# Altium PCB v1.PcbDoc (part 1 of 2)
Units mil, origin at the board's own origin, x right, y up, seen from the top; angles counter-clockwise.
Board outline 4577.38 x 7303.15 mil, 2 copper layers (Top Layer, Bottom Layer); 301 components, 195 nets, 1014 pads, 0 vias.
Unrouted connection lines stored in the file: 517.
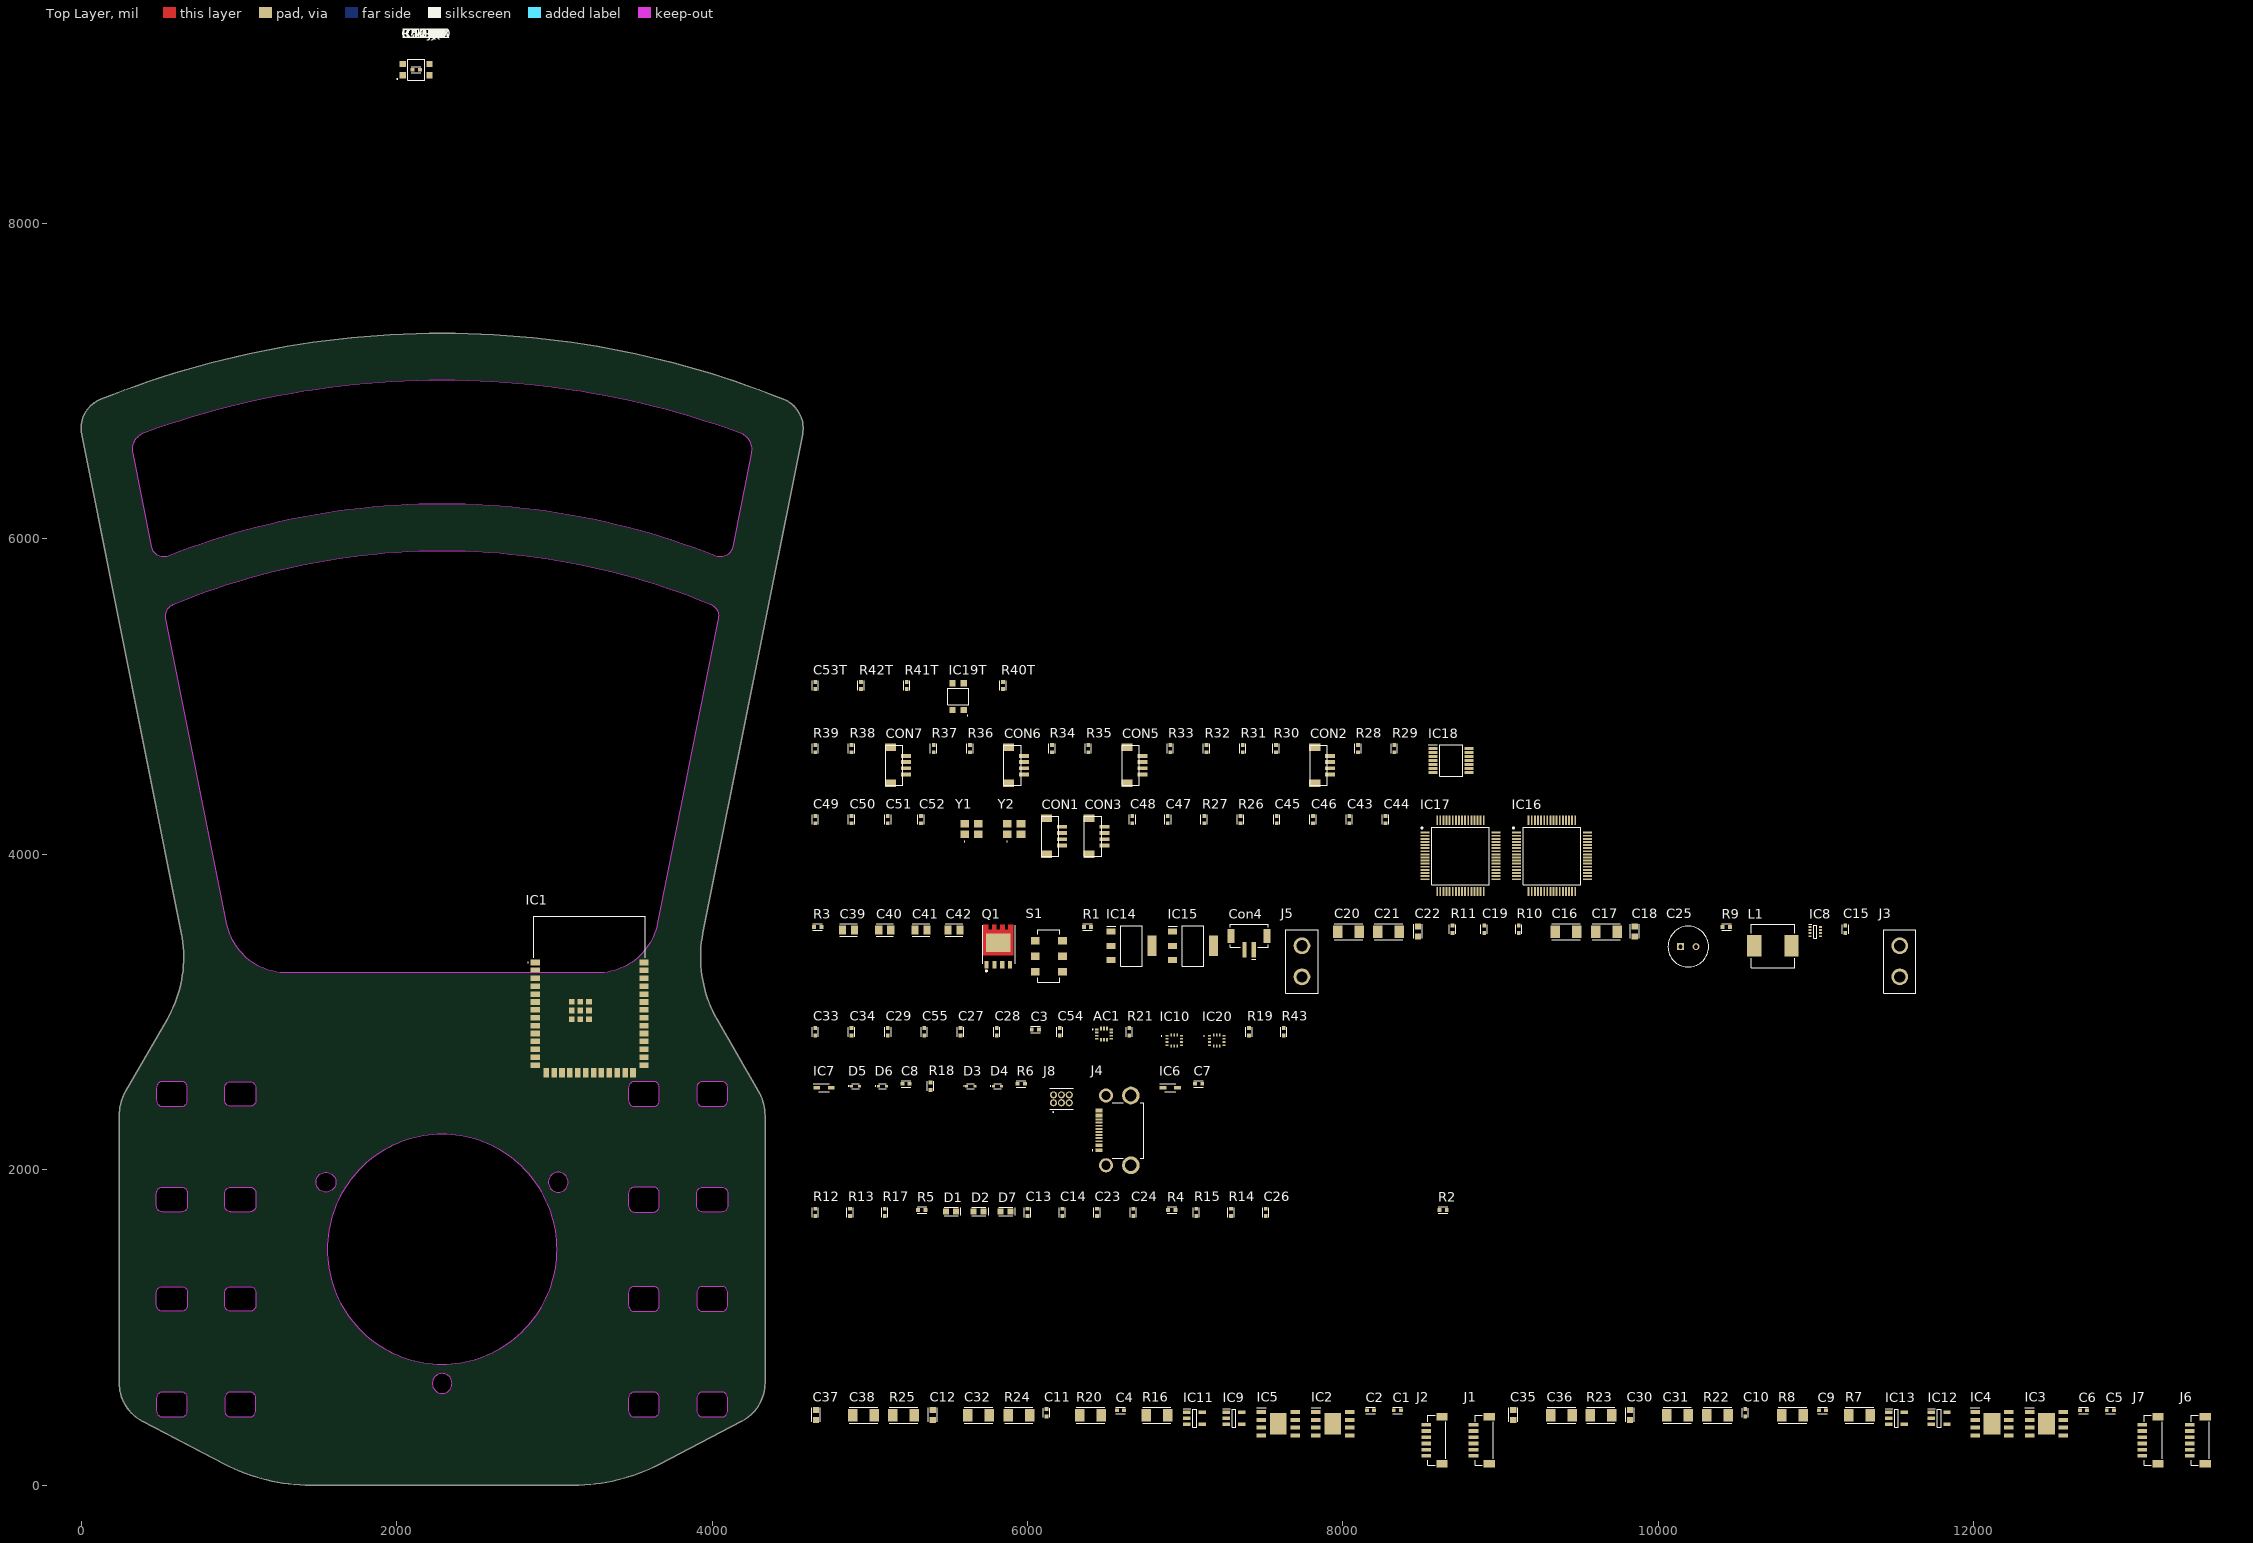
[diagram p0: Top Layer view]
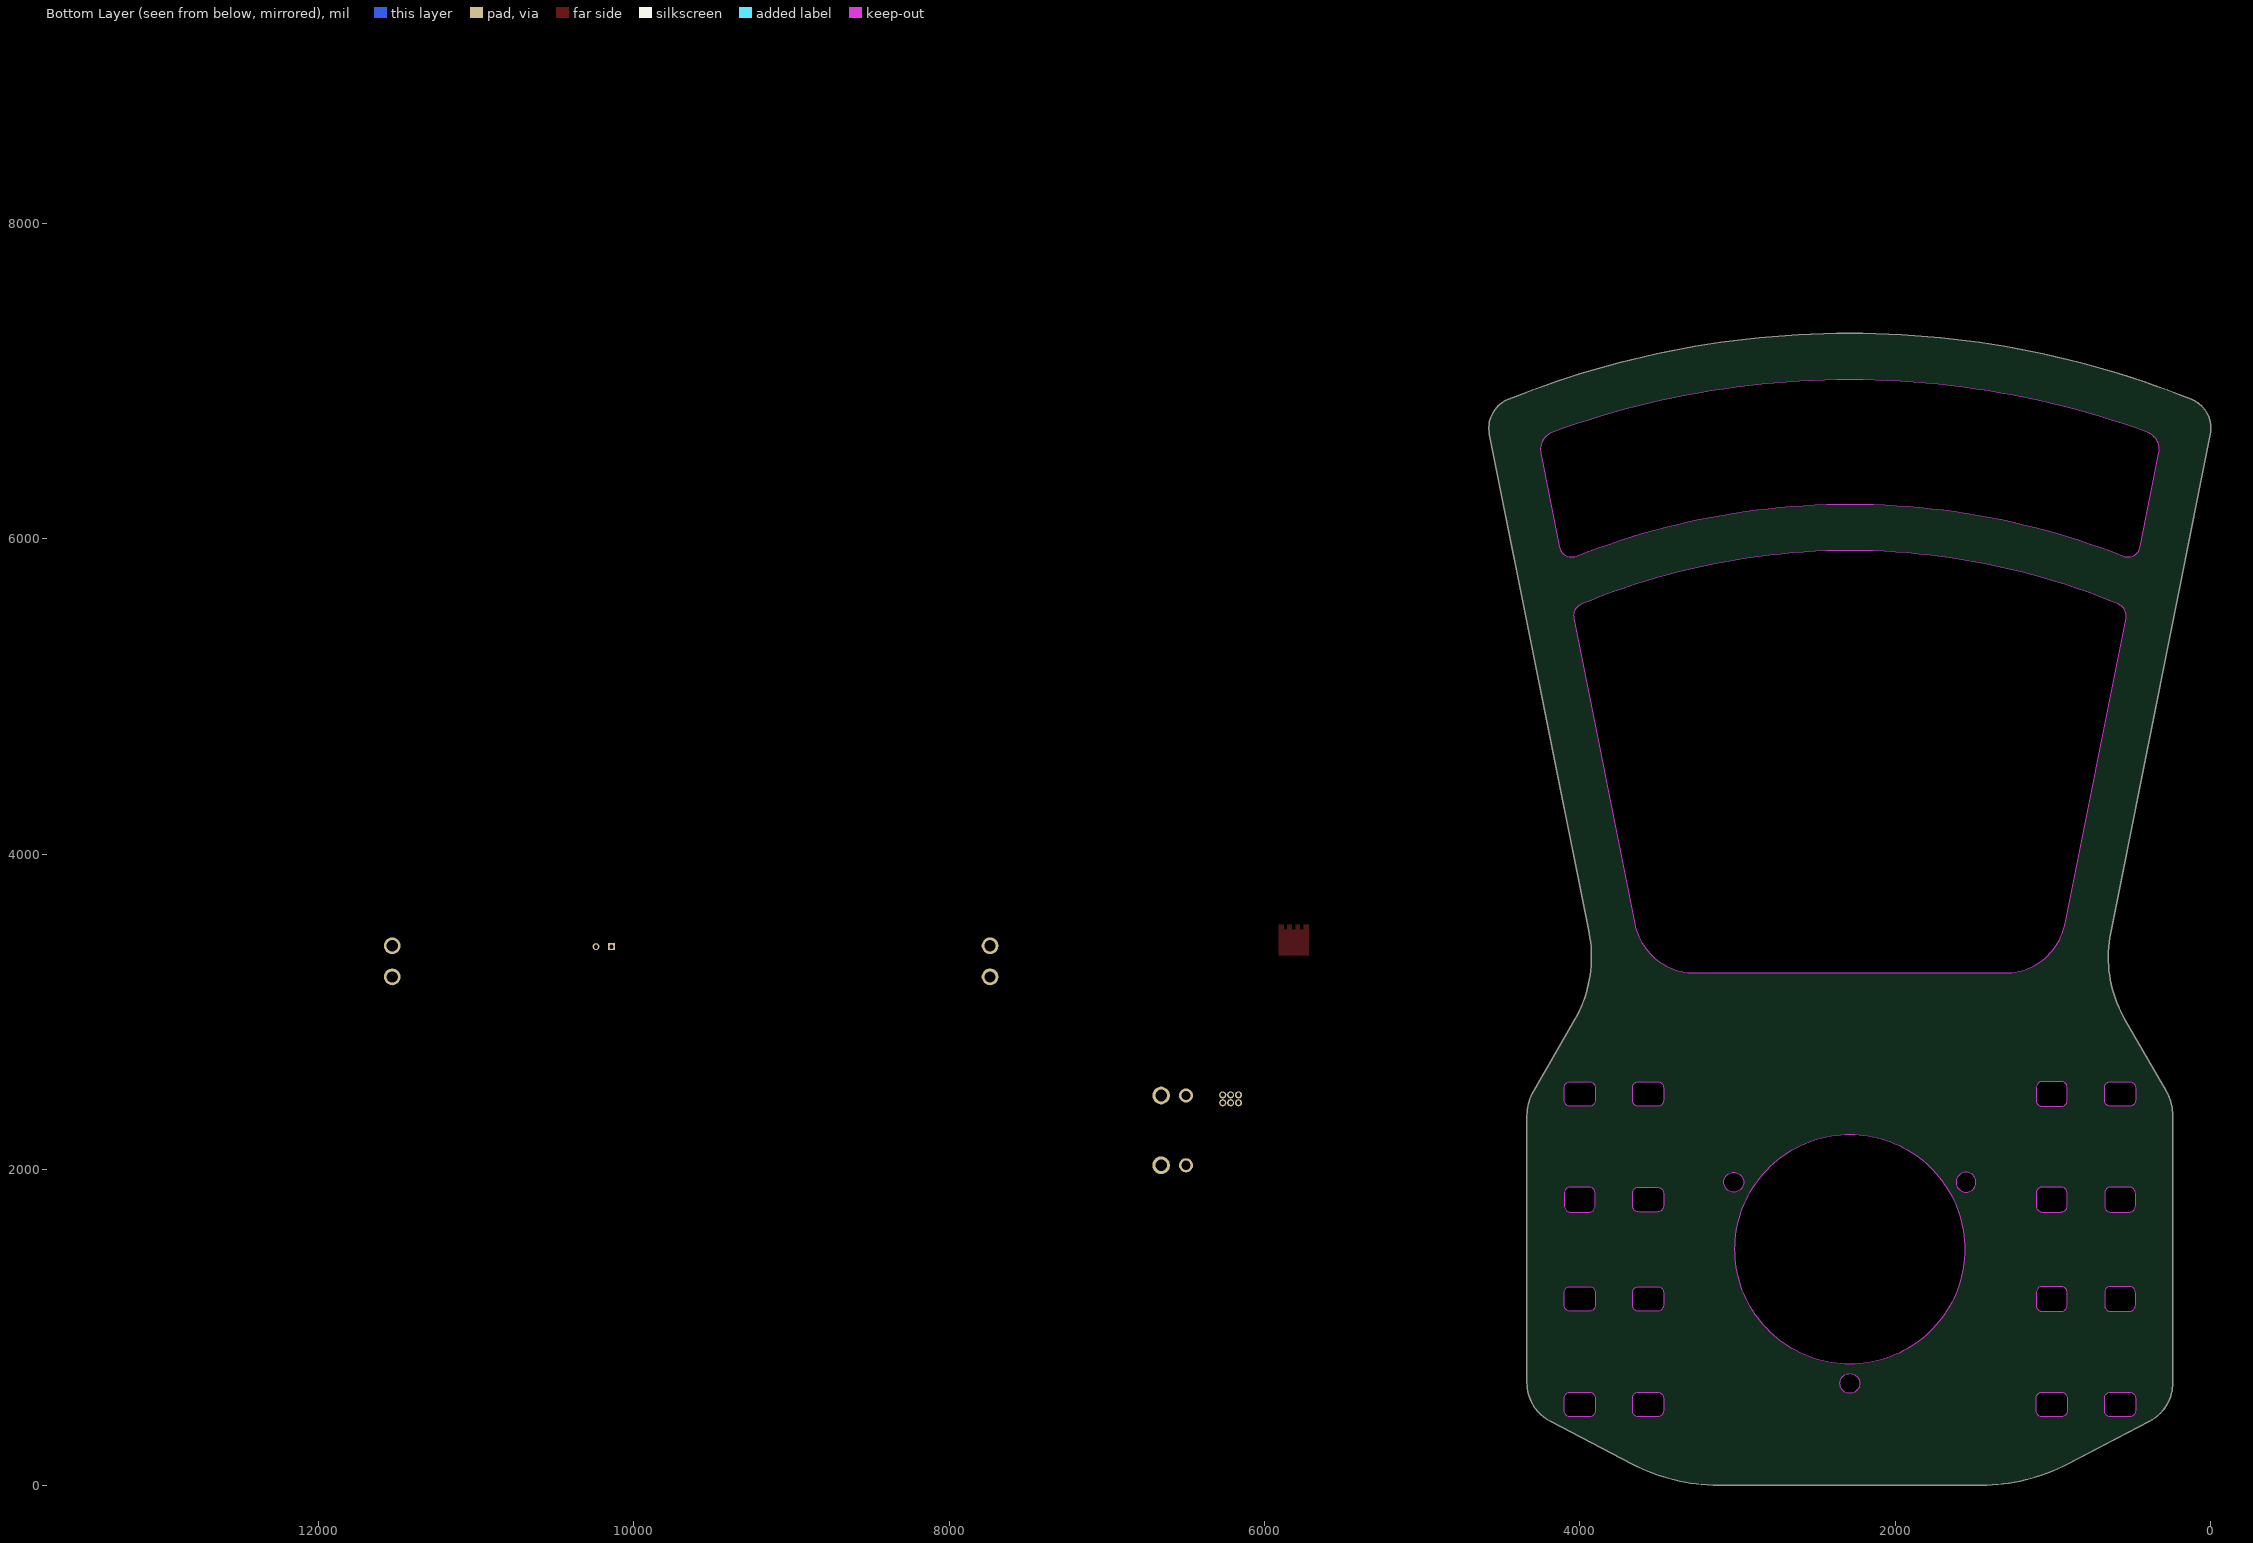
[diagram p1: Bottom Layer view, seen from below]

## Layer stack, top to bottom
Top Solder: solder mask 0.4, Solder Resist, Dk 3.5
Top Layer: signal copper 1.4
Dielectric 1: dielectric 12.6, FR-4, Dk 4.8
Bottom Layer: signal copper 1.4
Bottom Solder: solder mask 0.4, Solder Resist, Dk 3.5

## Board outline
390.04,405.46 cw(c517.4,649.86) 241.81,649.86 241.81,2342.77 cw(c556.77,2342.77) 284.01,2500.25 545.4,2953.01 ccw(c-136.5,3346.71) 635.65,3500.92 4.06,6663.38 cw(c197.1,6701.93) 123.7,6884.59 cw(c2289.05,1496.31) 4454.41,6884.59 cw(c4381.01,6701.93) 4574.04,6663.38 3942.46,3500.92 ccw(c4714.61,3346.71) 4032.7,2953.01 4294.1,2500.25 cw(c4021.34,2342.77) 4336.3,2342.77 4336.3,649.86 cw(c4060.71,649.86) 4188.06,405.46 3667.01,133.93 cw(c3121.19,1181.35) 3121.19,0.25 1456.92,0.25 cw(c1456.92,1181.35) 911.1,133.93
cut-out: 447.95,5948.44 329.42,6541.95 cw(c445.24,6565.08) 404.87,6676.07 cw(c2289.05,1496.31) 4173.24,6676.07 cw(c4132.86,6565.08) 4248.69,6541.95 4130.15,5948.44 cw(c4052.94,5963.86) 4024.02,5890.62 ccw(c2289.05,1496.31) 554.08,5890.62 cw(c525.17,5963.86)
cut-out: 925.21,3558.74 538.22,5496.48 cw(c615.43,5511.9) 585.14,5584.58 cw(c2289.05,1496.31) 3992.97,5584.58 cw(c3962.68,5511.9) 4039.89,5496.48 3652.9,3558.74 cw(c3274.3,3634.36) 3274.3,3248.28 1303.8,3248.28 cw(c1303.8,3634.36)
cut-out: 3903.23,2441.19 ccw(c3942.6,2441.19) 3942.6,2401.82 4060.71,2401.82 ccw(c4060.71,2441.19) 4100.08,2441.19 4100.08,2519.93 ccw(c4060.71,2519.93) 4060.71,2559.31 3942.6,2559.31 ccw(c3942.6,2519.93) 3903.23,2519.93
cut-out: 3470.16,2441.19 ccw(c3509.53,2441.19) 3509.53,2401.82 3627.64,2401.82 ccw(c3627.64,2441.19) 3667.01,2441.19 3667.01,2519.93 ccw(c3627.64,2519.93) 3627.64,2559.31 3509.53,2559.31 ccw(c3509.53,2519.93) 3470.16,2519.93
cut-out: 3903.23,1771.9 3903.23,1850.64 cw(c3942.6,1850.64) 3942.6,1890.01 4060.71,1890.01 cw(c4060.71,1850.64) 4100.08,1850.64 4100.08,1771.9 cw(c4060.71,1771.9) 4060.71,1732.53 3942.6,1732.53 cw(c3942.6,1771.9)
cut-out: 3509.53,1732.53 3627.64,1732.53 ccw(c3627.64,1771.9) 3667.01,1771.9 3667.01,1850.64 ccw(c3627.64,1850.64) 3627.64,1890.01 3509.53,1890.01 ccw(c3509.53,1850.64) 3470.16,1850.64 3470.16,1771.9 ccw(c3509.53,1771.9)
cut-out: 3470.16,1141.98 ccw(c3509.53,1141.98) 3509.53,1102.61 3627.64,1102.61 ccw(c3627.64,1141.98) 3667.01,1141.98 3667.01,1220.72 ccw(c3627.64,1220.72) 3627.64,1260.09 3509.53,1260.09 ccw(c3509.53,1220.72) 3470.16,1220.72
cut-out: 3903.23,1141.98 ccw(c3942.6,1141.98) 3942.6,1102.61 4060.71,1102.61 ccw(c4060.71,1141.98) 4100.08,1141.98 4100.08,1220.72 ccw(c4060.71,1220.72) 4060.71,1260.09 3942.6,1260.09 ccw(c3942.6,1220.72) 3903.23,1220.72
cut-out: 3470.16,472.69 ccw(c3509.53,472.69) 3509.53,433.32 3627.64,433.32 ccw(c3627.64,472.69) 3667.01,472.69 3667.01,551.43 ccw(c3627.64,551.43) 3627.64,590.8 3509.53,590.8 ccw(c3509.53,551.43) 3470.16,551.43
cut-out: 3903.23,472.69 ccw(c3942.6,472.69) 3942.6,433.32 4060.71,433.32 ccw(c4060.71,472.69) 4100.08,472.69 4100.08,551.43 ccw(c4060.71,551.43) 4060.71,590.8 3942.6,590.8 ccw(c3942.6,551.43) 3903.23,551.43
cut-out: 2962.52,1921.51 ccw(c3025.52,1921.51) 3025.52,1858.52 ccw(c3025.52,1921.51) 3088.51,1921.51 ccw(c3025.52,1921.51) 3025.52,1984.5 ccw(c3025.52,1921.51)
cut-out: 1552.59,1858.52 cw(c1552.59,1921.51) 1489.6,1921.51 cw(c1552.59,1921.51) 1552.59,1984.5 cw(c1552.59,1921.51) 1615.58,1921.51 cw(c1552.59,1921.51)
cut-out: 1560.71,1496.31 ccw(c2289.05,1496.31) 2289.05,767.97 ccw(c2289.05,1496.31) 3017.4,1496.31 ccw(c2289.05,1496.31) 2289.05,2224.66 ccw(c2289.05,1496.31)
cut-out: 2226.06,645.92 ccw(c2289.05,645.92) 2289.05,582.93 ccw(c2289.05,645.92) 2352.05,645.92 ccw(c2289.05,645.92) 2289.05,708.91 ccw(c2289.05,645.92)
cut-out: 950.47,2401.82 cw(c950.47,2441.19) 911.1,2441.19 911.1,2519.93 cw(c950.47,2519.93) 950.47,2559.31 1068.58,2559.31 cw(c1068.58,2519.93) 1107.95,2519.93 1107.95,2441.19 cw(c1068.58,2441.19) 1068.58,2401.82
cut-out: 517.4,2401.82 635.51,2401.82 ccw(c635.51,2441.19) 674.88,2441.19 674.88,2519.93 ccw(c635.51,2519.93) 635.51,2559.31 517.4,2559.31 ccw(c517.4,2519.93) 478.03,2519.93 478.03,2441.19 ccw(c517.4,2441.19)
cut-out: 517.4,1732.53 cw(c517.4,1771.9) 478.03,1771.9 478.03,1850.64 cw(c517.4,1850.64) 517.4,1890.01 635.51,1890.01 cw(c635.51,1850.64) 674.88,1850.64 674.88,1771.9 cw(c635.51,1771.9) 635.51,1732.53
cut-out: 911.1,1771.9 911.1,1850.64 cw(c950.47,1850.64) 950.47,1890.01 1068.58,1890.01 cw(c1068.58,1850.64) 1107.95,1850.64 1107.95,1771.9 cw(c1068.58,1771.9) 1068.58,1732.53 950.47,1732.53 cw(c950.47,1771.9)
cut-out: 517.4,1102.61 cw(c517.4,1141.98) 478.03,1141.98 478.03,1220.72 cw(c517.4,1220.72) 517.4,1260.09 635.51,1260.09 cw(c635.51,1220.72) 674.88,1220.72 674.88,1141.98 cw(c635.51,1141.98) 635.51,1102.61
cut-out: 950.47,1102.61 cw(c950.47,1141.98) 911.1,1141.98 911.1,1220.72 cw(c950.47,1220.72) 950.47,1260.09 1068.58,1260.09 cw(c1068.58,1220.72) 1107.95,1220.72 1107.95,1141.98 cw(c1068.58,1141.98) 1068.58,1102.61
cut-out: 911.1,472.69 ccw(c950.47,472.69) 950.47,433.32 1068.58,433.32 ccw(c1068.58,472.69) 1107.95,472.69 1107.95,551.43 ccw(c1068.58,551.43) 1068.58,590.8 950.47,590.8 ccw(c950.47,551.43) 911.1,551.43
cut-out: 478.03,472.69 ccw(c517.4,472.69) 517.4,433.32 635.51,433.32 ccw(c635.51,472.69) 674.88,472.69 674.88,551.43 ccw(c635.51,551.43) 635.51,590.8 517.4,590.8 ccw(c517.4,551.43) 478.03,551.43

## Design rules (kind name [scope] priority, off if disabled: settings)
BoardOutlineClearance [All] p1: gap=31.5 ignorepadtopadclearanceinfootprint=FALSE
Clearance [All] p1: gap=5 ignorepadtopadclearanceinfootprint=TRUE except(7.87: Arc-THPad Track-THPad SMDPad-THPad; 10: THPad-Fill THPad-Poly THPad-Region Via-Fill Via-Poly Via-Region; 12.99: Arc-Hole Track-Hole SMDPad-Hole THPad-Hole Via-Hole Fill-Hole Poly-Hole Region-Hole; 19.68: THPad-THPad)
HoleSize [All] p1: absolutevalues=TRUE maxlimit=157.48 minlimit=0.79 maxpercent=80.000 minpercent=20.000
HoleToHoleClearance [All] p1: gap=5 allowstackedmicrovias=TRUE
PlaneClearance [All] p1: clearance=11.81
PlaneConnect PlaneConnect_1 [(HasFootprint('R 2512'))] p1: planeconnectstyle=Relief reliefexpansion=20 reliefentries=4 reliefconductorwidth=10 reliefairgap=10
PlaneConnect [All] p2: planeconnectstyle=Relief reliefexpansion=20 reliefentries=4 reliefconductorwidth=10 reliefairgap=10
PolygonConnect "Polygon Power Connection" [(HasFootprint('DFN 5x6')) OR  (HasFootprint('R 2512')) OR  IsVia OR  HasFootprint('SMD PAD')  OR  (HasFootprint('DJNR60454R5FERROCORE'))  OR  (HasFootprint ('SON50P200X200X80-9N-D')) OR (HasFootprint('SOT230P700X180-4N'))  OR    InNetClass('Power')] p1: connectstyle=Direct reliefconductorwidth=10 reliefentries=4 polygonreliefangle="90 Angle" airgapwidth=10 // Conection to high power components
PolygonConnect [All] p2: connectstyle=Relief reliefconductorwidth=10 reliefentries=4 polygonreliefangle="90 Angle" airgapwidth=10
RoutingVias [All] p1: holewidth=11.81 width=19.68 viastyle="Through Hole" minholewidth=7.87 minwidth=11.81 maxholewidth=39.37 maxwidth=50
SilkToSilkClearance [All] p1: silktosilkclearance=5
SolderMaskExpansion "Tented Vias" [IsVia] p1: expansion=4 istentingtop=TRUE
SolderMaskExpansion [All] p2: expansion=4 istentingtop=FALSE
Width [All] p1: maxlimit=39.37 minlimit=5 preferedwidth=11.81 minimp=50.000000 maximp=50.000000 favimp=50.000000
25 further rules are at their usual default settings.

## Classes and differential pairs
channel class Sensors: U_Sensors1 U_Sensors2 U_Sensors3 U_Sensors4 U_Sensors5 U_Sensors6 U_Sensors7 U_Sensors8 U_Sensors9 U_Sensors10 U_Sensors11 U_Sensors12 U_Sensors13 U_Sensors14 U_Sensors15 U_Sensors16 U_Sensors17 U_Sensors18 U_Sensors19 U_Sensors20 U_Sensors21 U_Sensors22 U_Sensors23 U_Sensors24 U_Sensors25 U_Sensors26 U_Sensors27 U_Sensors28 U_Sensors29 U_Sensors30 U_Sensors31 U_Sensors32
component class U_STM: C43 C44 C45 C46 C47 C48 C49 C50 C51 C52 CON1 CON3 IC16 IC17 R26 R27 Y1 Y2
component class U_STM-Interface: CON2 CON5 CON6 CON7 IC18 R28 R29 R30 R31 R32 R33 R34 R35 R36 R37 R38 R39
component class U_Sensors32: C53AF IC19AF R40AF R41AF R42AF
component class U_Sensors31: C53AE IC19AE R40AE R41AE R42AE
component class U_Sensors30: C53AD IC19AD R40AD R41AD R42AD
component class U_Sensors29: C53AC IC19AC R40AC R41AC R42AC
component class U_Sensors28: C53AB IC19AB R40AB R41AB R42AB
component class U_Sensors27: C53AA IC19AA R40AA R41AA R42AA
component class U_Sensors26: C53Z IC19Z R40Z R41Z R42Z
component class U_Sensors25: C53Y IC19Y R40Y R41Y R42Y
component class U_Sensors24: C53X IC19X R40X R41X R42X
component class U_Sensors23: C53W IC19W R40W R41W R42W
component class U_Sensors22: C53V IC19V R40V R41V R42V
component class U_Sensors21: C53U IC19U R40U R41U R42U
component class U_Sensors20: C53T IC19T R40T R41T R42T
component class U_Sensors19: C53S IC19S R40S R41S R42S
component class U_Sensors18: C53R IC19R R40R R41R R42R
component class U_Sensors17: C53Q IC19Q R40Q R41Q R42Q
component class U_Sensors16: C53P IC19P R40P R41P R42P
component class U_Sensors15: C53O IC19O R40O R41O R42O
component class U_Sensors14: C53N IC19N R40N R41N R42N
component class U_Sensors13: C53M IC19M R40M R41M R42M
component class U_Sensors12: C53L IC19L R40L R41L R42L
component class U_Sensors11: C53K IC19K R40K R41K R42K
component class U_Sensors10: C53J IC19J R40J R41J R42J
component class U_Sensors9: C53I IC19I R40I R41I R42I
component class U_Sensors8: C53H IC19H R40H R41H R42H
component class U_Sensors7: C53G IC19G R40G R41G R42G
component class U_Sensors6: C53F IC19F R40F R41F R42F
component class U_Sensors5: C53E IC19E R40E R41E R42E
component class U_Sensors4: C53D IC19D R40D R41D R42D
component class U_Sensors3: C53C IC19C R40C R41C R42C
component class U_Sensors2: C53B IC19B R40B R41B R42B
component class U_Sensors1: C53A IC19A R40A R41A R42A
component class U_Power-line: C15 C16 C17 C18 C19 C20 C21 C22 C25 C39 C40 C41 C42 Con4 IC8 IC14 IC15 J3 J5 L1 Q1 R1 R3 R9 R10 R11 S1
component class U_IMU: AC1 C3 C27 C28 C29 C33 C34 C54 C55 IC10 IC20 R19 R21 R43
component class U_ESP: C13 C14 C23 C24 C26 D1 D2 D7 IC1 R2 R4 R5 R12 R13 R14 R15 R17
component class U_ESP-Interface: C7 C8 D3 D4 D5 D6 IC6 IC7 J4 J8 R6 R18
component class U_Drivers: C1 C2 C4 C5 C6 C9 C10 C11 C12 C30 C31 C32 C35 C36 C37 C38 IC2 IC3 IC4 IC5 IC9 IC11 IC12 IC13 J1 J2 J6 J7 R7 R8 R16 R20 R22 R23 R24 R25

## Components (designator, comment, footprint, x,y, rotation, side; value= is the part's Value field where it differs from the comment)
AC1 "LSM6DSOXTR" LGA-14_1 6485,2860 r0 top
C1 "100nF" "C 0402" 8345,475 r0 top
C2 "100nF" "C 0402" 8175,475 r0 top
C3 "100nF" "C 0402" 6050,2890 r0 top
C4 "100nF" "C 0402" 6590,475 r0 top
C5 "100nF" "C 0402" 12865,475 r0 top
C6 "100nF" "C 0402" 12695,475 r0 top
C7 "10uF" "C 0402" 7085,2545 r0 top
C8 "10uF" "C 0402" 5230,2545 r0 top
C9 "100nF" "C 0402" 11040,475 r0 top
C10 "100nF" "C 0402" 10550,460 r90 top
C11 "100nF" "C 0402" 6120,460 r90 top
C12 "0.1uF" "C 0603" 5400,445 r90 top
C13 "1uF" "C 0402" 6000,1730 r90 top
C14 "100nF" "C 0402" 6220,1730 r90 top
C15 "100nF" "C 0402" 11185,3525 r90 top
C16 "40uF" "C 1206" 9415,3510 r0 top
C17 "40uF" "C 1206" 9670,3510 r0 top
C18 "100nF" "C 0603" 9850,3510 r90 top
C19 "33nF" "C 0402" 8895,3525 r90 top
C20 "10uF" "C 1206" 8035,3510 r0 top
C21 "10uF" "C 1206" 8290,3510 r0 top
C22 "100nF" "C 0603" 8475,3510 r90 top
C23 "10uF" "C 0402" 6440,1730 r90 top
C24 "22uF" "C 0402" 6670,1730 r90 top
C25 "UVY1V101MED1TD" CAPPRD250W50D655H1250 10140,3415 r0 top
C26 "1uF" "C 0402" 7510,1730 r90 top
C27 "100nF" "C 0402" 5575,2875 r90 top
C28 "1uF" "C 0402" 5805,2875 r90 top
C29 "100nF" "C 0402" 5115,2875 r90 top
C30 "0.1uF" "C 0603" 9820,445 r90 top
C31 "47uF" "C 1206" 10120,445 r0 top
C32 "47uF" "C 1206" 5690,445 r0 top
C33 "1uF" "C 0402" 4655,2875 r90 top
C34 "100nF" "C 0402" 4885,2875 r90 top
C35 "0.1uF" "C 0603" 9080,445 r90 top
C36 "47uF" "C 1206" 9385,445 r0 top
C37 "0.1uF" "C 0603" 4660,445 r90 top
C38 "47uF" "C 1206" 4960,445 r0 top
C39 "22uF" "C 0805" 4865,3520 r0 top
C40 "10uF" "C 0805" 5095,3520 r0 top
C41 "22uF" "C 0805" 5325,3520 r0 top
C42 "10uF" "C 0805" 5535,3520 r0 top
C43 "1uF" "C 0402" 8040,4220 r90 top
C44 "100nF" "C 0402" 8270,4220 r90 top
C45 "1uF" "C 0402" 7580,4220 r90 top
C46 "100nF" "C 0402" 7810,4220 r90 top
C47 "100nF" "C 0402" 6890,4220 r90 top
C48 "100nF" "C 0402" 6665,4220 r90 top
C49 "22pF" "C 0402" 4655,4220 r90 top
C50 "22pF" "C 0402" 4885,4220 r90 top
C51 "22pF" "C 0402" 5115,4220 r90 top
C52 "22pF" "C 0402" 5325,4220 r90 top
C53A "22nF" "C 0402" 2124.5,8974.5 r0 top (schematic designator C53)
C53AA "22nF" "C 0402" 2124.5,8974.5 r0 top (schematic designator C53)
C53AB "22nF" "C 0402" 2124.5,8974.5 r0 top (schematic designator C53)
C53AC "22nF" "C 0402" 2124.5,8974.5 r0 top (schematic designator C53)
C53AD "22nF" "C 0402" 2124.5,8974.5 r0 top (schematic designator C53)
C53AE "22nF" "C 0402" 2124.5,8974.5 r0 top (schematic designator C53)
C53AF "22nF" "C 0402" 2124.5,8974.5 r0 top (schematic designator C53)
C53B "22nF" "C 0402" 2124.5,8974.5 r0 top (schematic designator C53)
C53C "22nF" "C 0402" 2124.5,8974.5 r0 top (schematic designator C53)
C53D "22nF" "C 0402" 2124.5,8974.5 r0 top (schematic designator C53)
C53E "22nF" "C 0402" 2124.5,8974.5 r0 top (schematic designator C53)
C53F "22nF" "C 0402" 2124.5,8974.5 r0 top (schematic designator C53)
C53G "22nF" "C 0402" 2124.5,8974.5 r0 top (schematic designator C53)
C53H "22nF" "C 0402" 2124.5,8974.5 r0 top (schematic designator C53)
C53I "22nF" "C 0402" 2124.5,8974.5 r0 top (schematic designator C53)
C53J "22nF" "C 0402" 2124.5,8974.5 r0 top (schematic designator C53)
C53K "22nF" "C 0402" 2124.5,8974.5 r0 top (schematic designator C53)
C53L "22nF" "C 0402" 2124.5,8974.5 r0 top (schematic designator C53)
C53M "22nF" "C 0402" 2124.5,8974.5 r0 top (schematic designator C53)
C53N "22nF" "C 0402" 2124.5,8974.5 r0 top (schematic designator C53)
C53O "22nF" "C 0402" 2124.5,8974.5 r0 top (schematic designator C53)
C53P "22nF" "C 0402" 2124.5,8974.5 r0 top (schematic designator C53)
C53Q "22nF" "C 0402" 2124.5,8974.5 r0 top (schematic designator C53)
C53R "22nF" "C 0402" 2124.5,8974.5 r0 top (schematic designator C53)
C53S "22nF" "C 0402" 2124.5,8974.5 r0 top (schematic designator C53)
C53T "22nF" "C 0402" 4655,5070 r90 top (schematic designator C53)
C53U "22nF" "C 0402" 2124.5,8974.5 r0 top (schematic designator C53)
C53V "22nF" "C 0402" 2124.5,8974.5 r0 top (schematic designator C53)
C53W "22nF" "C 0402" 2124.5,8974.5 r0 top (schematic designator C53)
C53X "22nF" "C 0402" 2124.5,8974.5 r0 top (schematic designator C53)
C53Y "22nF" "C 0402" 2124.5,8974.5 r0 top (schematic designator C53)
C53Z "22nF" "C 0402" 2124.5,8974.5 r0 top (schematic designator C53)
C54 "100nF" "C 0402" 6205,2875 r90 top
C55 "100nF" "C 0402" 5345,2875 r90 top
CON1 "4 PIN" BM04B-SRSS-TB 6160,4115 r90 top
CON2 "4 PIN" BM04B-SRSS-TB 7860,4565 r90 top
CON3 "4 PIN" BM04B-SRSS-TB 6430,4115 r90 top
Con4 "2Pin Power" B2B-ZR-SM4A-TF 7405,3395 r0 top
CON5 "4 PIN" BM04B-SRSS-TB 6670,4565 r90 top
CON6 "4 PIN" BM04B-SRSS-TB 5920,4565 r90 top
CON7 "4 PIN" BM04B-SRSS-TB 5170,4565 r90 top
D1 "LED BLUE" "LED 0603 BLUE" 5515,1735 r0 top
D2 "LED BLUE" "LED 0603 BLUE" 5690,1735 r0 top
D3 "LESD5D5.0CT1G" LESD5D50CT1G 5640,2530 r0 top
D4 "LESD5D5.0CT1G" LESD5D50CT1G 5810,2530 r0 top
D5 "LESD5D5.0CT1G" LESD5D50CT1G 4910,2530 r0 top
D6 "LESD5D5.0CT1G" LESD5D50CT1G 5080,2530 r0 top
D7 "LED BLUE" "LED 0603 BLUE" 5860,1735 r0 top
IC1 "ESP32-S3-WROOM-1-N16R8" ESP32S3WROOM1N16R8 3224.06,3106.97 r0 top
IC2 "DRV8251DDAR" SOIC127P600X170-9N 7935,390 r0 top
IC3 "DRV8251DDAR" SOIC127P600X170-9N 12460,390 r0 top
IC4 "DRV8251DDAR" SOIC127P600X170-9N 12115,390 r0 top
IC5 "DRV8251DDAR" SOIC127P600X170-9N 7590,390 r0 top
IC6 "BAT760-7" SOD2513X120N 6905,2520 r0 top
IC7 "BAT760-7" SOD2513X120N 4710,2520 r0 top
IC8 "TPS62933DRLR" SOTFL50P160X60-8N 10995,3510 r0 top
IC9 "INA180A2IDBVR" SOT95P280X145-5N 7310,425 r0 top
IC10 "BMI323" BMI323 6930,2820 r0 top
IC11 "INA180A2IDBVR" SOT95P280X145-5N 7060,425 r0 top
IC12 "INA180A2IDBVR" SOT95P280X145-5N 11780,425 r0 top
IC13 "INA180A2IDBVR" SOT95P280X145-5N 11510,425 r0 top
IC14 "AMS1117-3.3" SOT229P700X180-4N 6660,3420 r0 top
IC15 "AMS1117-5" SOT229P700X180-4N 7050,3420 r0 top
IC16 "STM32G070RBT6" QFP50P1200X1200X160-64N 9325,3990 r0 top
IC17 "STM32G070RBT6" QFP50P1200X1200X160-64N 8745,3990 r0 top
IC18 "MC74HCT125ADTR2G" SOP65P640X120-14N 8685,4595 r0 top
IC19A "KTIR0711S" KTIR0711S 2124.5,8974.5 r0 top (schematic designator IC19)
IC19AA "KTIR0711S" KTIR0711S 2124.5,8974.5 r0 top (schematic designator IC19)
IC19AB "KTIR0711S" KTIR0711S 2124.5,8974.5 r0 top (schematic designator IC19)
IC19AC "KTIR0711S" KTIR0711S 2124.5,8974.5 r0 top (schematic designator IC19)
IC19AD "KTIR0711S" KTIR0711S 2124.5,8974.5 r0 top (schematic designator IC19)
IC19AE "KTIR0711S" KTIR0711S 2124.5,8974.5 r0 top (schematic designator IC19)
IC19AF "KTIR0711S" KTIR0711S 2124.5,8974.5 r0 top (schematic designator IC19)
IC19B "KTIR0711S" KTIR0711S 2124.5,8974.5 r0 top (schematic designator IC19)
IC19C "KTIR0711S" KTIR0711S 2124.5,8974.5 r0 top (schematic designator IC19)
IC19D "KTIR0711S" KTIR0711S 2124.5,8974.5 r0 top (schematic designator IC19)
IC19E "KTIR0711S" KTIR0711S 2124.5,8974.5 r0 top (schematic designator IC19)
IC19F "KTIR0711S" KTIR0711S 2124.5,8974.5 r0 top (schematic designator IC19)
IC19G "KTIR0711S" KTIR0711S 2124.5,8974.5 r0 top (schematic designator IC19)
IC19H "KTIR0711S" KTIR0711S 2124.5,8974.5 r0 top (schematic designator IC19)
IC19I "KTIR0711S" KTIR0711S 2124.5,8974.5 r0 top (schematic designator IC19)
IC19J "KTIR0711S" KTIR0711S 2124.5,8974.5 r0 top (schematic designator IC19)
IC19K "KTIR0711S" KTIR0711S 2124.5,8974.5 r0 top (schematic designator IC19)
IC19L "KTIR0711S" KTIR0711S 2124.5,8974.5 r0 top (schematic designator IC19)
IC19M "KTIR0711S" KTIR0711S 2124.5,8974.5 r0 top (schematic designator IC19)
IC19N "KTIR0711S" KTIR0711S 2124.5,8974.5 r0 top (schematic designator IC19)
IC19O "KTIR0711S" KTIR0711S 2124.5,8974.5 r0 top (schematic designator IC19)
IC19P "KTIR0711S" KTIR0711S 2124.5,8974.5 r0 top (schematic designator IC19)
IC19Q "KTIR0711S" KTIR0711S 2124.5,8974.5 r0 top (schematic designator IC19)
IC19R "KTIR0711S" KTIR0711S 2124.5,8974.5 r0 top (schematic designator IC19)
IC19S "KTIR0711S" KTIR0711S 2124.5,8974.5 r0 top (schematic designator IC19)
IC19T "KTIR0711S" KTIR0711S 5560,5000 r90 top (schematic designator IC19)
IC19U "KTIR0711S" KTIR0711S 2124.5,8974.5 r0 top (schematic designator IC19)
IC19V "KTIR0711S" KTIR0711S 2124.5,8974.5 r0 top (schematic designator IC19)
IC19W "KTIR0711S" KTIR0711S 2124.5,8974.5 r0 top (schematic designator IC19)
IC19X "KTIR0711S" KTIR0711S 2124.5,8974.5 r0 top (schematic designator IC19)
IC19Y "KTIR0711S" KTIR0711S 2124.5,8974.5 r0 top (schematic designator IC19)
IC19Z "KTIR0711S" KTIR0711S 2124.5,8974.5 r0 top (schematic designator IC19)
IC20 "BMI323" BMI323 7200,2820 r0 top
J1 "BM06B-SRSS-TB_LF__SN_" BM06BSRSSTBLFSN 8890,285 r90 top
J2 "BM06B-SRSS-TB_LF__SN_" BM06BSRSSTBLFSN 8590,285 r90 top
J3 "XT30PB" XT30PB 11530,3420 r0 top
J4 "USB4500-03-0-A" USB4500030A 6610,2250 r90 top
J5 "XT30PB" XT30PB 7740,3420 r0 top
J6 "BM06B-SRSS-TB_LF__SN_" BM06BSRSSTBLFSN 13430,285 r90 top
J7 "BM06B-SRSS-TB_LF__SN_" BM06BSRSSTBLFSN 13130,285 r90 top
J8 "FTSH-103-01-F-D" FTSH-103-XX-YYY-D 6165,2425 r0 top
L1 "4.7uH" HPI0630 10725,3420 r0 top
Q1 "AON6403" "DFN 5x6" 5815,3415 r0 top
R1 "100k" "R 0402" 6380,3540 r0 top
R2 "10k" "R 0402" 8635,1745 r0 top
R3 "1k" "R 0402" 4670,3540 r0 top
R4 "47k" "R 0402" 6915,1745 r0 top
R5 "13k" "R 0402" 5330,1745 r0 top
R6 "10k" "R 0402" 5960,2545 r0 top
R7 "0.05R" "R 1206" 11275,445 r0 top
R8 "0.05R" "R 1206" 10850,445 r0 top
R9 "0" "R 0402" 10430,3540 r0 top
R10 "31.3K" "R 0402" 9115,3525 r90 top
R11 "10K" "R 0402" 8695,3525 r90 top
R12 "160" "R 0402" 4655,1730 r90 top
R13 "160" "R 0402" 4875,1730 r90 top
R14 "10k" "R 0402" 7290,1730 r90 top
R15 "10k" "R 0402" 7070,1730 r90 top
R16 "0.05R" "R 1206" 6820,445 r0 top
R17 "160" "R 0402" 5095,1730 r90 top
R18 "10k" "R 0402" 5385,2530 r90 top
R19 "0R" "R 0402" 7405,2875 r90 top
R20 "0.05R" "R 1206" 6400,445 r0 top
R21 "0R" "R 0402" 6645,2875 r90 top
R22 "0.05R" "R 1206" 10375,445 r0 top
R23 "0.05R" "R 1206" 9635,445 r0 top
R24 "0.05R" "R 1206" 5945,445 r0 top
R25 "0.05R" "R 1206" 5215,445 r0 top
R26 "100k" "R 0402" 7350,4220 r90 top
R27 "100k" "R 0402" 7120,4220 r90 top
R28 "0" "R 0402" 8095,4670 r90 top
R29 "0" "R 0402" 8325,4670 r90 top
R30 "0" "R 0402" 7575,4670 r90 top
R31 "0" "R 0402" 7365,4670 r90 top
R32 "0" "R 0402" 7135,4670 r90 top
R33 "0" "R 0402" 6905,4670 r90 top
R34 "0" "R 0402" 6155,4670 r90 top
R35 "0" "R 0402" 6385,4670 r90 top
R36 "0" "R 0402" 5635,4670 r90 top
R37 "0" "R 0402" 5405,4670 r90 top
R38 "0" "R 0402" 4885,4670 r90 top
R39 "0" "R 0402" 4655,4670 r90 top
R40A "10k" "R 0402" 2124.5,8974.5 r0 top (schematic designator R40)
R40AA "10k" "R 0402" 2124.5,8974.5 r0 top (schematic designator R40)
R40AB "10k" "R 0402" 2124.5,8974.5 r0 top (schematic designator R40)
R40AC "10k" "R 0402" 2124.5,8974.5 r0 top (schematic designator R40)
R40AD "10k" "R 0402" 2124.5,8974.5 r0 top (schematic designator R40)
R40AE "10k" "R 0402" 2124.5,8974.5 r0 top (schematic designator R40)
R40AF "10k" "R 0402" 2124.5,8974.5 r0 top (schematic designator R40)
R40B "10k" "R 0402" 2124.5,8974.5 r0 top (schematic designator R40)
R40C "10k" "R 0402" 2124.5,8974.5 r0 top (schematic designator R40)
R40D "10k" "R 0402" 2124.5,8974.5 r0 top (schematic designator R40)
R40E "10k" "R 0402" 2124.5,8974.5 r0 top (schematic designator R40)
R40F "10k" "R 0402" 2124.5,8974.5 r0 top (schematic designator R40)
R40G "10k" "R 0402" 2124.5,8974.5 r0 top (schematic designator R40)
R40H "10k" "R 0402" 2124.5,8974.5 r0 top (schematic designator R40)
R40I "10k" "R 0402" 2124.5,8974.5 r0 top (schematic designator R40)
R40J "10k" "R 0402" 2124.5,8974.5 r0 top (schematic designator R40)
R40K "10k" "R 0402" 2124.5,8974.5 r0 top (schematic designator R40)
R40L "10k" "R 0402" 2124.5,8974.5 r0 top (schematic designator R40)
R40M "10k" "R 0402" 2124.5,8974.5 r0 top (schematic designator R40)
R40N "10k" "R 0402" 2124.5,8974.5 r0 top (schematic designator R40)
R40O "10k" "R 0402" 2124.5,8974.5 r0 top (schematic designator R40)
R40P "10k" "R 0402" 2124.5,8974.5 r0 top (schematic designator R40)
R40Q "10k" "R 0402" 2124.5,8974.5 r0 top (schematic designator R40)
R40R "10k" "R 0402" 2124.5,8974.5 r0 top (schematic designator R40)
R40S "10k" "R 0402" 2124.5,8974.5 r0 top (schematic designator R40)
R40T "10k" "R 0402" 5845,5070 r90 top (schematic designator R40)
R40U "10k" "R 0402" 2124.5,8974.5 r0 top (schematic designator R40)
R40V "10k" "R 0402" 2124.5,8974.5 r0 top (schematic designator R40)
R40W "10k" "R 0402" 2124.5,8974.5 r0 top (schematic designator R40)
R40X "10k" "R 0402" 2124.5,8974.5 r0 top (schematic designator R40)
R40Y "10k" "R 0402" 2124.5,8974.5 r0 top (schematic designator R40)
R40Z "10k" "R 0402" 2124.5,8974.5 r0 top (schematic designator R40)
R41A "120R" "R 0402" 2124.5,8974.5 r0 top (schematic designator R41)
R41AA "120R" "R 0402" 2124.5,8974.5 r0 top (schematic designator R41)
R41AB "120R" "R 0402" 2124.5,8974.5 r0 top (schematic designator R41)
R41AC "120R" "R 0402" 2124.5,8974.5 r0 top (schematic designator R41)
R41AD "120R" "R 0402" 2124.5,8974.5 r0 top (schematic designator R41)
R41AE "120R" "R 0402" 2124.5,8974.5 r0 top (schematic designator R41)
R41AF "120R" "R 0402" 2124.5,8974.5 r0 top (schematic designator R41)
R41B "120R" "R 0402" 2124.5,8974.5 r0 top (schematic designator R41)
R41C "120R" "R 0402" 2124.5,8974.5 r0 top (schematic designator R41)
R41D "120R" "R 0402" 2124.5,8974.5 r0 top (schematic designator R41)
R41E "120R" "R 0402" 2124.5,8974.5 r0 top (schematic designator R41)
R41F "120R" "R 0402" 2124.5,8974.5 r0 top (schematic designator R41)
R41G "120R" "R 0402" 2124.5,8974.5 r0 top (schematic designator R41)
R41H "120R" "R 0402" 2124.5,8974.5 r0 top (schematic designator R41)
R41I "120R" "R 0402" 2124.5,8974.5 r0 top (schematic designator R41)
R41J "120R" "R 0402" 2124.5,8974.5 r0 top (schematic designator R41)
R41K "120R" "R 0402" 2124.5,8974.5 r0 top (schematic designator R41)
R41L "120R" "R 0402" 2124.5,8974.5 r0 top (schematic designator R41)
R41M "120R" "R 0402" 2124.5,8974.5 r0 top (schematic designator R41)
R41N "120R" "R 0402" 2124.5,8974.5 r0 top (schematic designator R41)
R41O "120R" "R 0402" 2124.5,8974.5 r0 top (schematic designator R41)
R41P "120R" "R 0402" 2124.5,8974.5 r0 top (schematic designator R41)
R41Q "120R" "R 0402" 2124.5,8974.5 r0 top (schematic designator R41)
R41R "120R" "R 0402" 2124.5,8974.5 r0 top (schematic designator R41)
R41S "120R" "R 0402" 2124.5,8974.5 r0 top (schematic designator R41)
R41T "120R" "R 0402" 5235,5070 r90 top (schematic designator R41)
R41U "120R" "R 0402" 2124.5,8974.5 r0 top (schematic designator R41)
R41V "120R" "R 0402" 2124.5,8974.5 r0 top (schematic designator R41)
R41W "120R" "R 0402" 2124.5,8974.5 r0 top (schematic designator R41)
R41X "120R" "R 0402" 2124.5,8974.5 r0 top (schematic designator R41)
R41Y "120R" "R 0402" 2124.5,8974.5 r0 top (schematic designator R41)
R41Z "120R" "R 0402" 2124.5,8974.5 r0 top (schematic designator R41)
R42A "8k" "R 0402" 2124.5,8974.5 r0 top (schematic designator R42)
R42AA "8k" "R 0402" 2124.5,8974.5 r0 top (schematic designator R42)
R42AB "8k" "R 0402" 2124.5,8974.5 r0 top (schematic designator R42)
R42AC "8k" "R 0402" 2124.5,8974.5 r0 top (schematic designator R42)
R42AD "8k" "R 0402" 2124.5,8974.5 r0 top (schematic designator R42)
R42AE "8k" "R 0402" 2124.5,8974.5 r0 top (schematic designator R42)
R42AF "8k" "R 0402" 2124.5,8974.5 r0 top (schematic designator R42)
R42B "8k" "R 0402" 2124.5,8974.5 r0 top (schematic designator R42)
R42C "8k" "R 0402" 2124.5,8974.5 r0 top (schematic designator R42)
R42D "8k" "R 0402" 2124.5,8974.5 r0 top (schematic designator R42)
R42E "8k" "R 0402" 2124.5,8974.5 r0 top (schematic designator R42)
R42F "8k" "R 0402" 2124.5,8974.5 r0 top (schematic designator R42)
R42G "8k" "R 0402" 2124.5,8974.5 r0 top (schematic designator R42)
R42H "8k" "R 0402" 2124.5,8974.5 r0 top (schematic designator R42)
R42I "8k" "R 0402" 2124.5,8974.5 r0 top (schematic designator R42)
R42J "8k" "R 0402" 2124.5,8974.5 r0 top (schematic designator R42)
R42K "8k" "R 0402" 2124.5,8974.5 r0 top (schematic designator R42)
R42L "8k" "R 0402" 2124.5,8974.5 r0 top (schematic designator R42)
R42M "8k" "R 0402" 2124.5,8974.5 r0 top (schematic designator R42)
R42N "8k" "R 0402" 2124.5,8974.5 r0 top (schematic designator R42)
R42O "8k" "R 0402" 2124.5,8974.5 r0 top (schematic designator R42)
R42P "8k" "R 0402" 2124.5,8974.5 r0 top (schematic designator R42)
R42Q "8k" "R 0402" 2124.5,8974.5 r0 top (schematic designator R42)
R42R "8k" "R 0402" 2124.5,8974.5 r0 top (schematic designator R42)
R42S "8k" "R 0402" 2124.5,8974.5 r0 top (schematic designator R42)
R42T "8k" "R 0402" 4945,5070 r90 top (schematic designator R42)
R42U "8k" "R 0402" 2124.5,8974.5 r0 top (schematic designator R42)
R42V "8k" "R 0402" 2124.5,8974.5 r0 top (schematic designator R42)
R42W "8k" "R 0402" 2124.5,8974.5 r0 top (schematic designator R42)
R42X "8k" "R 0402" 2124.5,8974.5 r0 top (schematic designator R42)
R42Y "8k" "R 0402" 2124.5,8974.5 r0 top (schematic designator R42)
R42Z "8k" "R 0402" 2124.5,8974.5 r0 top (schematic designator R42)
R43 "0R" "R 0402" 7625,2875 r90 top
S1 "CL-SB-22B-01T" CLSB22B01T 6135,3355 r90 top
Y1 "MCSJK-7U-16.00-12-30-80-B-30" MCSJK7U1600123080B30 5645,4160 r0 top
Y2 "MCSJK-7U-16.00-12-30-80-B-30" MCSJK7U1600123080B30 5915,4160 r0 top

## Footprints (in the part's own frame and the unit in brackets; to place one, negate y for a bottom-side part, rotate by r counter-clockwise, add the part's x,y. Pads: shape width x height; smd on the part's side, far side on the other; paste and mask are expansions set on the pad)
B2B-ZR-SM4A-TF [mm] "JST ZH Top entry 1.5mm"
  rect 1.1x2.3 smd mask+0.1: 0(-2.9,2.2) 0(2.9,2.2)
  rect 0.7x2.5 smd mask+0.1: 1(0.75,0) 2(-0.75,0)
  silkscreen extent -3,-1.5 3.1,4.1, body extent -2.95,-1.15 3.05,4.05, height 5
BM04B-SRSS-TB [mm]
  rect 0.6x1.6 smd: 1(-1.5,-1.5) 2(-0.5,-1.5) 3(0.5,-1.5) 4(1.5,-1.5)
  rect 1.2x1.8 smd: A(-2.9,1) B(2.9,1)
  silkscreen extent -3.2,-1 3.2,1.75, body extent -3,-1.9 3,1.7, height 4.25
BM06BSRSSTBLFSN [mm]
  rect 0.6x1.55 smd: 1(-2.5,1.588) 2(-1.5,1.588) 3(-0.5,1.588) 4(0.5,1.588) 5(1.5,1.588) 6(2.5,1.588)
  rect 1.2x1.8 smd: 7(-3.8,-0.937) 8(3.8,-0.937)
  silkscreen extent -4,-1.59 4,1.31, body extent -4,-1.54 4,2.06, height 4.3
BMI323 [mm]
  rect 0.475x0.25 smd: 1(-1.163,0.75) 2(-1.163,0.25) 3(-1.163,-0.25) 4(-1.163,-0.75) 8(1.163,-0.75) 9(1.163,-0.25) 10(1.163,0.25) 11(1.163,0.75)
  rect 0.25x0.475 smd: 5(-0.5,-0.913) 6(0,-0.913) 7(0.5,-0.913) 12(0.5,0.913) 13(0,0.913) 14(-0.5,0.913)
  silkscreen extent -2.1,0.7 -2,0.8, body extent -1.5,-1.25 1.5,1.25, height 0.84
"C 0402" [mil] "MLCC Capacitor 0402"
  rect 25x23.62 smd: 1(-23,0) 2(23,0)
  silkscreen extent -30,-20 30,20, body extent -30,-10 29,10, height 14
"C 0603" [mil]
  rect 38x39.37 smd: 1(-32,0) 2(32,0)
  silkscreen extent -43,-28 47,28, body extent -31,-16 31,16, height 24
"C 0805" [mil]
  rect 45x59.06 smd: 1(-38,0) 2(38,0)
  silkscreen extent -55,-39 55,39, body extent -39,-25 39,25, height 49
"C 1206" [mil]
  rect 60x78.74 smd: 1(-68,0) 2(68,0)
  silkscreen extent -91,-51 89,51, body extent -63,-31 63,31, height 59
CAPPRD250W50D655H1250 [mm]
  rect 1.1x1.1 hole 0.7: 1(0,0)
  round 1.1 hole 0.7: 2(2.5,0)
  silkscreen extent -2.02,-3.27 4.52,3.27, body extent -2.15,-3.4 4.65,3.4, height 12.5
CLSB22B01T [mm]
  rect 1.2x1.4 smd: 1(-2.5,-2.2) 2(0,-2.2) 3(2.5,-2.2) 4(-2.5,2.2) 5(0,2.2) 6(2.5,2.2)
  silkscreen extent -4.25,-1.75 4.25,1.75, body extent -4.25,-2.78 4.25,2.78, height 5.6
"DFN 5x6" [mm]
  rect 0.65x1.2 smd: 1(-1.905,-2.91) 2(-0.635,-2.91) 3(0.635,-2.91) 4(1.905,-2.91)
  rect 4x3 smd: 5_8(0,0.6)
  Top Layer region: -2.4,-1.4 -2.4,3.5 -1.6,3.5 -1.6,2.7 -1,2.7 -1,3.5 -0.3,3.5 -0.3,2.7 0.3,2.7 0.3,3.5 1,3.5 1,2.7 1.6,2.7 1.6,3.5 2.4,3.5 2.4,-1.4
  silkscreen extent -2.5,-4.02 2.7,3.42, body extent -2.5,-3.27 2.5,3.26, height 1.2
ESP32S3WROOM1N16R8 [mm]
  rect 1.5x0.9 smd: 1(-8.75,5.26) 2(-8.75,3.99) 3(-8.75,2.72) 4(-8.75,1.45) 5(-8.75,0.18) 6(-8.75,-1.09) 7(-8.75,-2.36) 8(-8.75,-3.63) 9(-8.75,-4.9) 10(-8.75,-6.17) 11(-8.75,-7.44) 12(-8.75,-8.71) 13(-8.75,-9.98) 14(-8.75,-11.25) 27(8.75,-11.25) 28(8.75,-9.98) 29(8.75,-8.71) 30(8.75,-7.44) 31(8.75,-6.17) 32(8.75,-4.9) 33(8.75,-3.63) 34(8.75,-2.36) 35(8.75,-1.09) 36(8.75,0.18) 37(8.75,1.45) 38(8.75,2.72) 39(8.75,3.99) 40(8.75,5.26)
  rect 0.9x1.5 smd: 15(-6.985,-12.5) 16(-5.715,-12.5) 17(-4.445,-12.5) 18(-3.175,-12.5) 19(-1.905,-12.5) 20(-0.635,-12.5) 21(0.635,-12.5) 22(1.905,-12.5) 23(3.175,-12.5) 24(4.445,-12.5) 25(5.715,-12.5) 26(6.985,-12.5)
  rect 0.9x0.9 smd: 41(-1.5,-2.46) 42(-2.9,-1.06) 43(-2.9,-2.46) 44(-2.9,-3.86) 45(-1.5,-3.86) 46(-0.1,-3.86) 47(-0.1,-2.46) 48(-0.1,-1.06) 49(-1.5,-1.06)
  silkscreen extent -10,5.21 9,12.75, body extent -9,0 9,3.25, height 12.75
FTSH-103-XX-YYY-D [mm]
  round 1.15 hole 0.71: 1(0,0) 2(0,1.27) 3(1.27,0) 4(1.27,1.27) 5(2.54,0) 6(2.54,1.27)
  silkscreen extent -0.64,-1.55 3.17,2.35, body extent -0.66,-1.03 3.15,2.39, height 5.67
HPI0630 [mm] "Power Inductor"
  rect 2.3x3.5 smd: 1(-3,0) 2(3,0)
  silkscreen extent -3.5,-3.5 3.5,3.5, body extent -3.65,-3.35 3.65,3.35, height 2.81
KTIR0711S [mm]
  rect 1x1 smd: 1(-2.15,-0.9) 2(-2.15,0.9) 3(2.15,0.9) 4(2.15,-0.9)
  silkscreen extent -3.1,-1.7 1.35,1.7
"LED 0603 BLUE" [mil]
  rect 38x39.37 smd: 1(-32,0) 2(32,0)
  silkscreen extent -43,-28 63,28, body extent -31,-16 31,16, height 22
LESD5D50CT1G [mm]
  rect 0.48x0.4 smd: 1(-0.66,0) 2(0.66,0)
  silkscreen extent -1.15,-0.4 0.6,0.4, body extent -0.8,-0.4 0.8,0.4, height 0.6
LGA-14_1 [mm]
  rect 0.6x0.3 smd: 1(-1.15,0.75) 2(-1.15,0.25) 3(-1.15,-0.25) 4(-1.15,-0.75) 8(1.15,-0.75) 9(1.15,-0.25) 10(1.15,0.25) 11(1.15,0.75)
  rect 0.3x0.6 smd: 5(-0.5,-0.9) 6(0,-0.9) 7(0.5,-0.9) 12(0.5,0.9) 13(0,0.9) 14(-0.5,0.9)
  silkscreen extent -1.83,0.74 -1.8,0.77, body extent -1.62,-1.25 1.38,1.25, height 0.86
MCSJK7U1600123080B30 [mm]
  rect 1.4x1.2 smd: 1(-1.1,-0.85) 2(1.1,-0.85) 3(1.1,0.85) 4(-1.1,0.85)
  silkscreen extent -1.2,-2.05 -1.1,-1.95, body extent -1.68,-1.33 1.68,1.33, height 0.9
QFP50P1200X1200X160-64N [mm]
  rect 1.475x0.3 smd: 1(-5.738,3.75) 2(-5.738,3.25) 3(-5.738,2.75) 4(-5.738,2.25) 5(-5.738,1.75) 6(-5.738,1.25) 7(-5.738,0.75) 8(-5.738,0.25) 9(-5.738,-0.25) 10(-5.738,-0.75) 11(-5.738,-1.25) 12(-5.738,-1.75) 13(-5.738,-2.25) 14(-5.738,-2.75) 15(-5.738,-3.25) 16(-5.738,-3.75) 33(5.738,-3.75) 34(5.738,-3.25) 35(5.738,-2.75) 36(5.738,-2.25) 37(5.738,-1.75) 38(5.738,-1.25) 39(5.738,-0.75) 40(5.738,-0.25) 41(5.738,0.25) 42(5.738,0.75) 43(5.738,1.25) 44(5.738,1.75) 45(5.738,2.25) 46(5.738,2.75) 47(5.738,3.25) 48(5.738,3.75)
  rect 0.3x1.475 smd: 17(-3.75,-5.738) 18(-3.25,-5.738) 19(-2.75,-5.738) 20(-2.25,-5.738) 21(-1.75,-5.738) 22(-1.25,-5.738) 23(-0.75,-5.738) 24(-0.25,-5.738) 25(0.25,-5.738) 26(0.75,-5.738) 27(1.25,-5.738) 28(1.75,-5.738) 29(2.25,-5.738) 30(2.75,-5.738) 31(3.25,-5.738) 32(3.75,-5.738) 49(3.75,5.738) 50(3.25,5.738) 51(2.75,5.738) 52(2.25,5.738) 53(1.75,5.738) 54(1.25,5.738) 55(0.75,5.738) 56(0.25,5.738) 57(-0.25,5.738) 58(-0.75,5.738) 59(-1.25,5.738) 60(-1.75,5.738) 61(-2.25,5.738) 62(-2.75,5.738) 63(-3.25,5.738) 64(-3.75,5.738)
  silkscreen extent -6.35,-4.65 4.65,4.65, body extent -6,-6 6,6, height 1.6
"R 0402" [mil] "0402 resistor Chip"
  rect 25x23.62 smd: 1(-23,0) 2(23,0)
  silkscreen extent -30,-20 30,20, body extent -20,-10 20,10, height 12
"R 1206" [mil]
  rect 60x78.74 smd: 1(-68,0) 2(68,0)
  silkscreen extent -91,-51 89,51, body extent -75,-32 75,31, height 24
SOD2513X120N [mm]
  rect 1.075x0.5 smd: 1(-1.162,0) 2(1.162,0)
  silkscreen extent -1.7,-0.65 0.85,0.65, body extent -1.25,-0.65 1.25,0.65, height 1.2
SOIC127P600X170-9N [mm]
  rect 1.525x0.65 smd: 1(-2.712,1.905) 2(-2.712,0.635) 3(-2.712,-0.635) 4(-2.712,-1.905) 5(2.712,-1.905) 6(2.712,-0.635) 7(2.712,0.635) 8(2.712,1.905)
  rect 2.71x3.4 smd: 9(0,0)
  silkscreen extent -3.47,2.58 -1.95,2.58, body extent -3,-2.45 3,2.45, height 1.7
SOP65P640X120-14N [mm]
  rect 1.45x0.45 smd: 1(-2.925,1.95) 2(-2.925,1.3) 3(-2.925,0.65) 4(-2.925,0) 5(-2.925,-0.65) 6(-2.925,-1.3) 7(-2.925,-1.95) 8(2.925,-1.95) 9(2.925,-1.3) 10(2.925,-0.65) 11(2.925,0) 12(2.925,0.65) 13(2.925,1.3) 14(2.925,1.95)
  silkscreen extent -3.65,-2.5 1.85,2.52, body extent -3.2,-2.5 3.2,2.5, height 1.2
SOT95P280X145-5N [mm]
  rect 1.2x0.6 smd: 1(-1.25,0.95) 2(-1.25,0) 3(-1.25,-0.95) 4(1.25,-0.95) 5(1.25,0.95)
  silkscreen extent -1.85,-1.45 0.3,1.5, body extent -1.4,-1.45 1.4,1.45, height 1.2
SOT229P700X180-4N [mm]
  rect 1.45x0.95 smd: 1(-3.3,2.29) 2(-3.3,0) 3(-3.3,-2.29)
  rect 1.45x3.25 smd: 4(3.3,0)
  silkscreen extent -4.03,-3.25 1.75,3.25, body extent -3.35,-3.15 3.35,3.15, height 1.8
SOTFL50P160X60-8N [mm]
  rect 0.475x0.3 smd: 1(-0.838,0.75) 2(-0.838,0.25) 3(-0.838,-0.25) 4(-0.838,-0.75) 5(0.838,-0.75) 6(0.838,-0.25) 7(0.838,0.25) 8(0.838,0.75)
  silkscreen extent -1.07,-1.05 0.25,1.15, body extent -0.8,-1.02 0.8,1.08, height 0.6
USB4500030A [mm]
  rect 0.6x1.1 smd: A1(-3.2,4) A4(-2.4,4) A9(2.4,4) A12(3.2,4)
  rect 0.3x1.1 smd: A5(-1.25,4) A6(-0.25,4) A7(0.25,4) A8(1.25,4) B5(1.75,4) B6(0.75,4) B7(-0.75,4) B8(-1.75,4)
  round 2.28 hole 1.52: MH1(-5.62,2.85) MH2(5.62,2.85)
  round 2.85 hole 1.9: MH3(-5.62,-1.15) MH4(5.62,-1.15)
  silkscreen extent -4.47,-3.25 4.47,5.07, body extent -5.78,-2.95 5.78,4.25, height 2.36
XT30PB [mm]
  round 2.7 hole 1.8: 1(0,0) 2(0,-5)
  silkscreen extent -2.6,-7.6 2.6,2.6, body extent -2.6,-7.6 2.6,2.6, height 10.66